# Altium PCB padshapes.PcbDoc
Units mm, origin at the board's own origin, x right, y up, seen from the top; angles counter-clockwise.
Board outline 152.4 x 101.6 mm, 2 copper layers (Top Layer, Bottom Layer); 10 components, 0 nets, 20 pads, 0 vias.
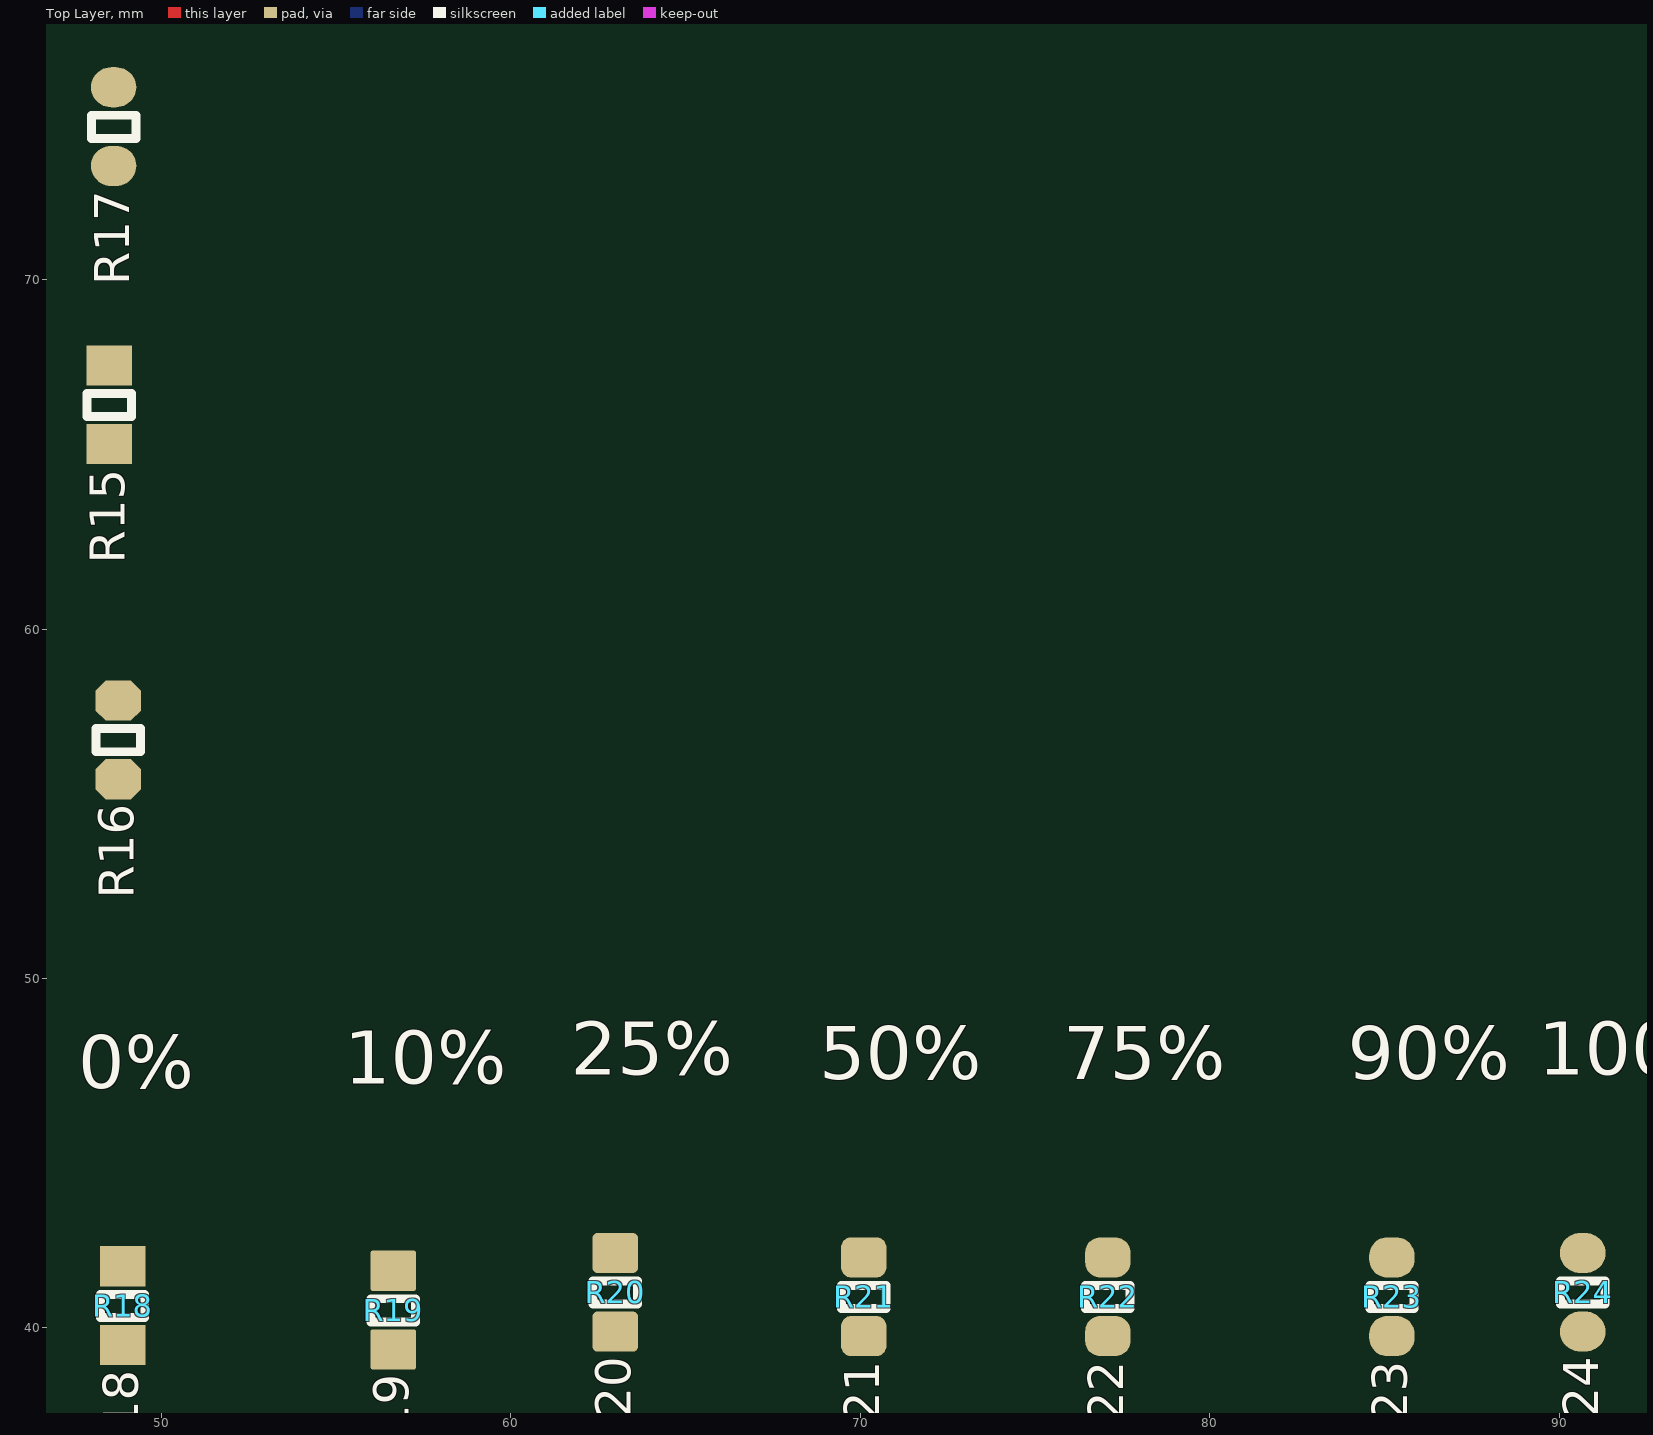
[diagram p0: Top Layer view]
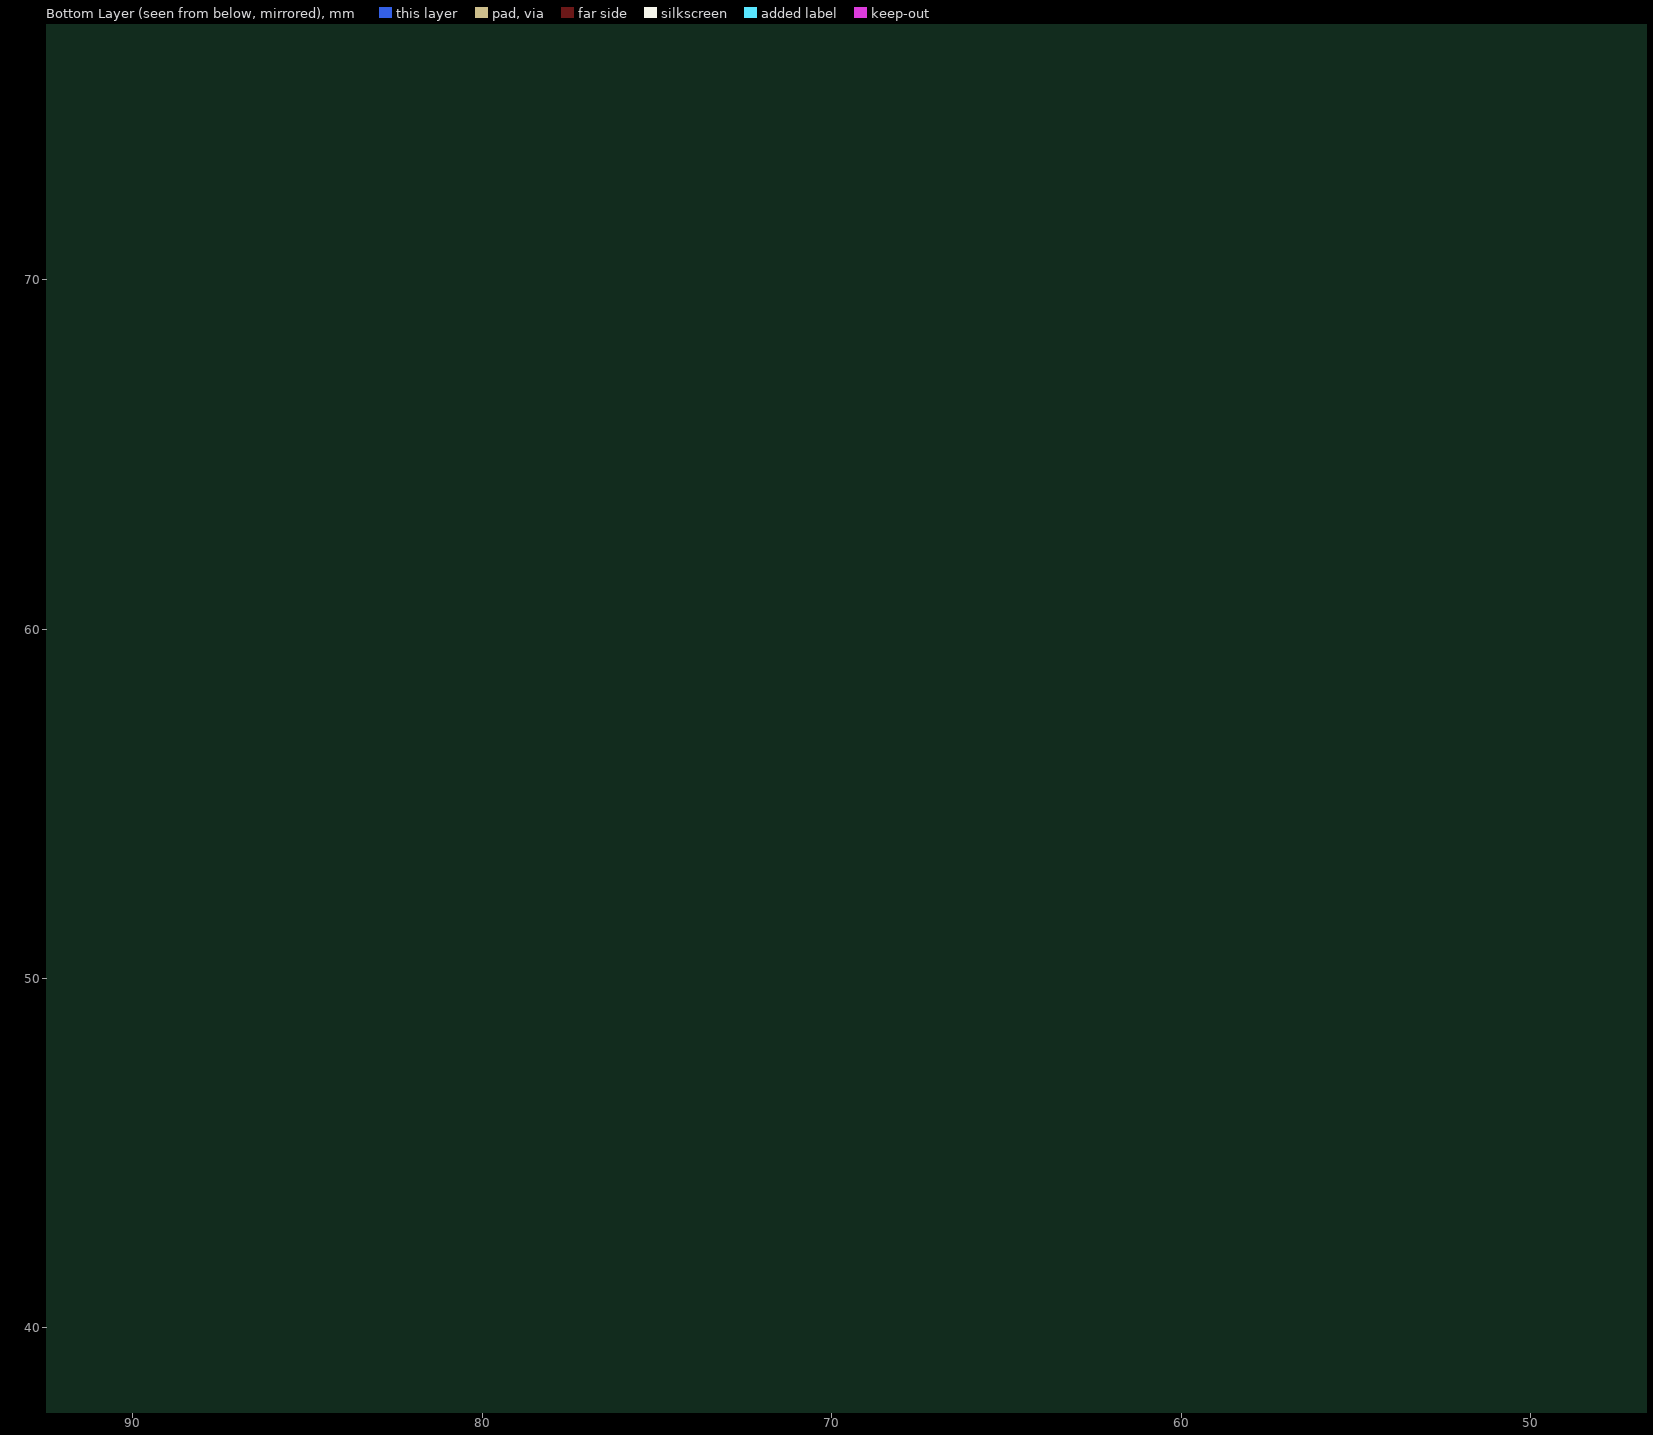
[diagram p1: Bottom Layer view, seen from below]

## Layer stack, top to bottom
Top Solder: solder mask 0.0102, Solder Resist, Dk 3.5
Top Layer: signal copper 0.0356
Dielectric 1: dielectric 0.32, FR-4, Dk 4.8
Bottom Layer: signal copper 0.0356
Bottom Solder: solder mask 0.0102, Solder Resist, Dk 3.5

## Board outline
25.4,25.4 177.8,25.4 177.8,127 25.4,127

## Design rules (kind name [scope] priority, off if disabled: settings)
Clearance [All] p1: gap=0.254 ignorepadtopadclearanceinfootprint=FALSE except(0: Arc-Hole Track-Hole SMDPad-Hole THPad-Hole Via-Hole Fill-Hole Poly-Hole Region-Hole Text-Hole)
PolygonConnect [All] p1: connectstyle=Relief reliefconductorwidth=0.254 reliefentries=4 polygonreliefangle="90 Angle" airgapwidth=0.254
RoutingVias [All] p1: holewidth=0.711 width=1.27 viastyle="Through Hole" minholewidth=0.711 minwidth=1.27 maxholewidth=0.711 maxwidth=1.27
SolderMaskExpansion [All] p1: expansion=0.102
Width [All] p1: maxlimit=0.254 minlimit=0.254 preferedwidth=0.254
30 further rules are at their usual default settings.

## Components (designator, comment, footprint, x,y, rotation, side; value= is the part's Value field where it differs from the comment)
R15 "1M" 0805#1 48.514,66.421 r90 top (schematic designator R14)
R16 "1M" 0805#2 48.768,56.827 r90 top (schematic designator R14)
R17 "1M" 0805#3 48.641,74.379 r90 top (schematic designator R14)
R18 "1M" 0805#4 48.895,40.64 r90 top (schematic designator R14)
R19 "1M" 0805#5 56.642,40.513 r90 top (schematic designator R14)
R20 "1M" 0805#6 62.992,41.021 r90 top (schematic designator R14)
R21 "1M" 0805#7 70.104,40.894 r90 top (schematic designator R14)
R22 "1M" 0805#8 77.089,40.894 r90 top (schematic designator R14)
R23 "1M" 0805#9 85.217,40.894 r90 top (schematic designator R14)
R24 "1M" 0805#10 90.678,41.021 r90 top (schematic designator R14)

## Footprints (in the part's own frame and the unit in brackets; to place one, negate y for a bottom-side part, rotate by r counter-clockwise, add the part's x,y. Pads: shape width x height; smd on the part's side, far side on the other; paste and mask are expansions set on the pad)
0805#1 [mm]
  rect 1.15x1.3 smd: 1(-1.125,0) 2(1.125,0)
  silkscreen extent -0.34,-0.64 0.32,0.64, body extent -1.1,-0.7 1.1,0.7, height 0.6
0805#2 [mm]
  oct 1.15x1.3 smd: 1(-1.125,0) 2(1.125,0)
  silkscreen extent -0.34,-0.64 0.32,0.64, body extent -1.1,-0.7 1.1,0.7, height 0.6
0805#3 [mm]
  oval 1.15x1.3 smd: 1(-1.125,0) 2(1.125,0)
  silkscreen extent -0.34,-0.64 0.32,0.64, body extent -1.1,-0.7 1.1,0.7, height 0.6
0805#4 [mm]
  rrect0% 1.15x1.3 smd: 1(-1.125,0) 2(1.125,0)
  silkscreen extent -0.34,-0.64 0.32,0.64, body extent -1.1,-0.7 1.1,0.7, height 0.6
0805#5 [mm]
  rrect10% 1.15x1.3 smd: 1(-1.125,0) 2(1.125,0)
  silkscreen extent -0.34,-0.64 0.32,0.64, body extent -1.1,-0.7 1.1,0.7, height 0.6
0805#6 [mm]
  rrect25% 1.15x1.3 smd: 1(-1.125,0) 2(1.125,0)
  silkscreen extent -0.34,-0.64 0.32,0.64, body extent -1.1,-0.7 1.1,0.7, height 0.6
0805#7 [mm]
  rrect50% 1.15x1.3 smd: 1(-1.125,0) 2(1.125,0)
  silkscreen extent -0.34,-0.64 0.32,0.64, body extent -1.1,-0.7 1.1,0.7, height 0.6
0805#8 [mm]
  rrect75% 1.15x1.3 smd: 1(-1.125,0) 2(1.125,0)
  silkscreen extent -0.34,-0.64 0.32,0.64, body extent -1.1,-0.7 1.1,0.7, height 0.6
0805#9 [mm]
  rrect90% 1.15x1.3 smd: 1(-1.125,0) 2(1.125,0)
  silkscreen extent -0.34,-0.64 0.32,0.64, body extent -1.1,-0.7 1.1,0.7, height 0.6
0805#10 [mm]
  rrect100% 1.15x1.3 smd: 1(-1.125,0) 2(1.125,0)
  silkscreen extent -0.34,-0.64 0.32,0.64, body extent -1.1,-0.7 1.1,0.7, height 0.6

## Part data
R15 R16 R17 R18 R19 R20 R21 R22 R23 R24: library part "R 0805", "Resistor 1%", Power=0.125W, tolerance=1%, Fabrikant=BOURNS, Fabrikantnummer="CR Series", Footprint Type=SMD, SMD=YES, spanning=100V

## Nets (pads, with @x,y where several pads share a name; then routed paths per layer and width w, separated by ;. In a path a pad name is that pad's centre, name@x,y a point inside that pad or via, vN(x,y) a via of type N, cw(c..) or ccw(c..) an arc to the next point about the centre after c; other vN are vias at no path point)
pads on no net: R15.1 R15.2 R16.1 R16.2 R17.1 R17.2 R18.1 R18.2 R19.1 R19.2 R20.1 R20.2 R21.1 R21.2 R22.1 R22.2 R23.1 R23.2 R24.1 R24.2

## Silkscreen, mask and mechanical layers (free items; w line width, h text height)
Top Overlay:
  text "round" at 32.893,74.193 h1.52
  text "rectangular" at 27.94,65.405 h1.52
  text "octagonal" at 30.607,55.753 h1.52
  text "25%" at 61.722,47.244 h1.52
  text "100%" at 89.408,47.244 h1.52
  text "50%" at 68.834,47.117 h1.52
  text "75%" at 75.819,47.117 h1.52
  text "90%" at 83.947,47.117 h1.52
  text "10%" at 55.245,46.99 h1.52
  text "0%" at 47.625,46.863 h1.52
  text "corner / radius" at 29.21,45.212 h1.52
  text "rounded / rectangular" at 29.083,37.592 h1.52